# EAGLE board LedStripController Nutzen (EAGLE 6.4), part 1 of 2
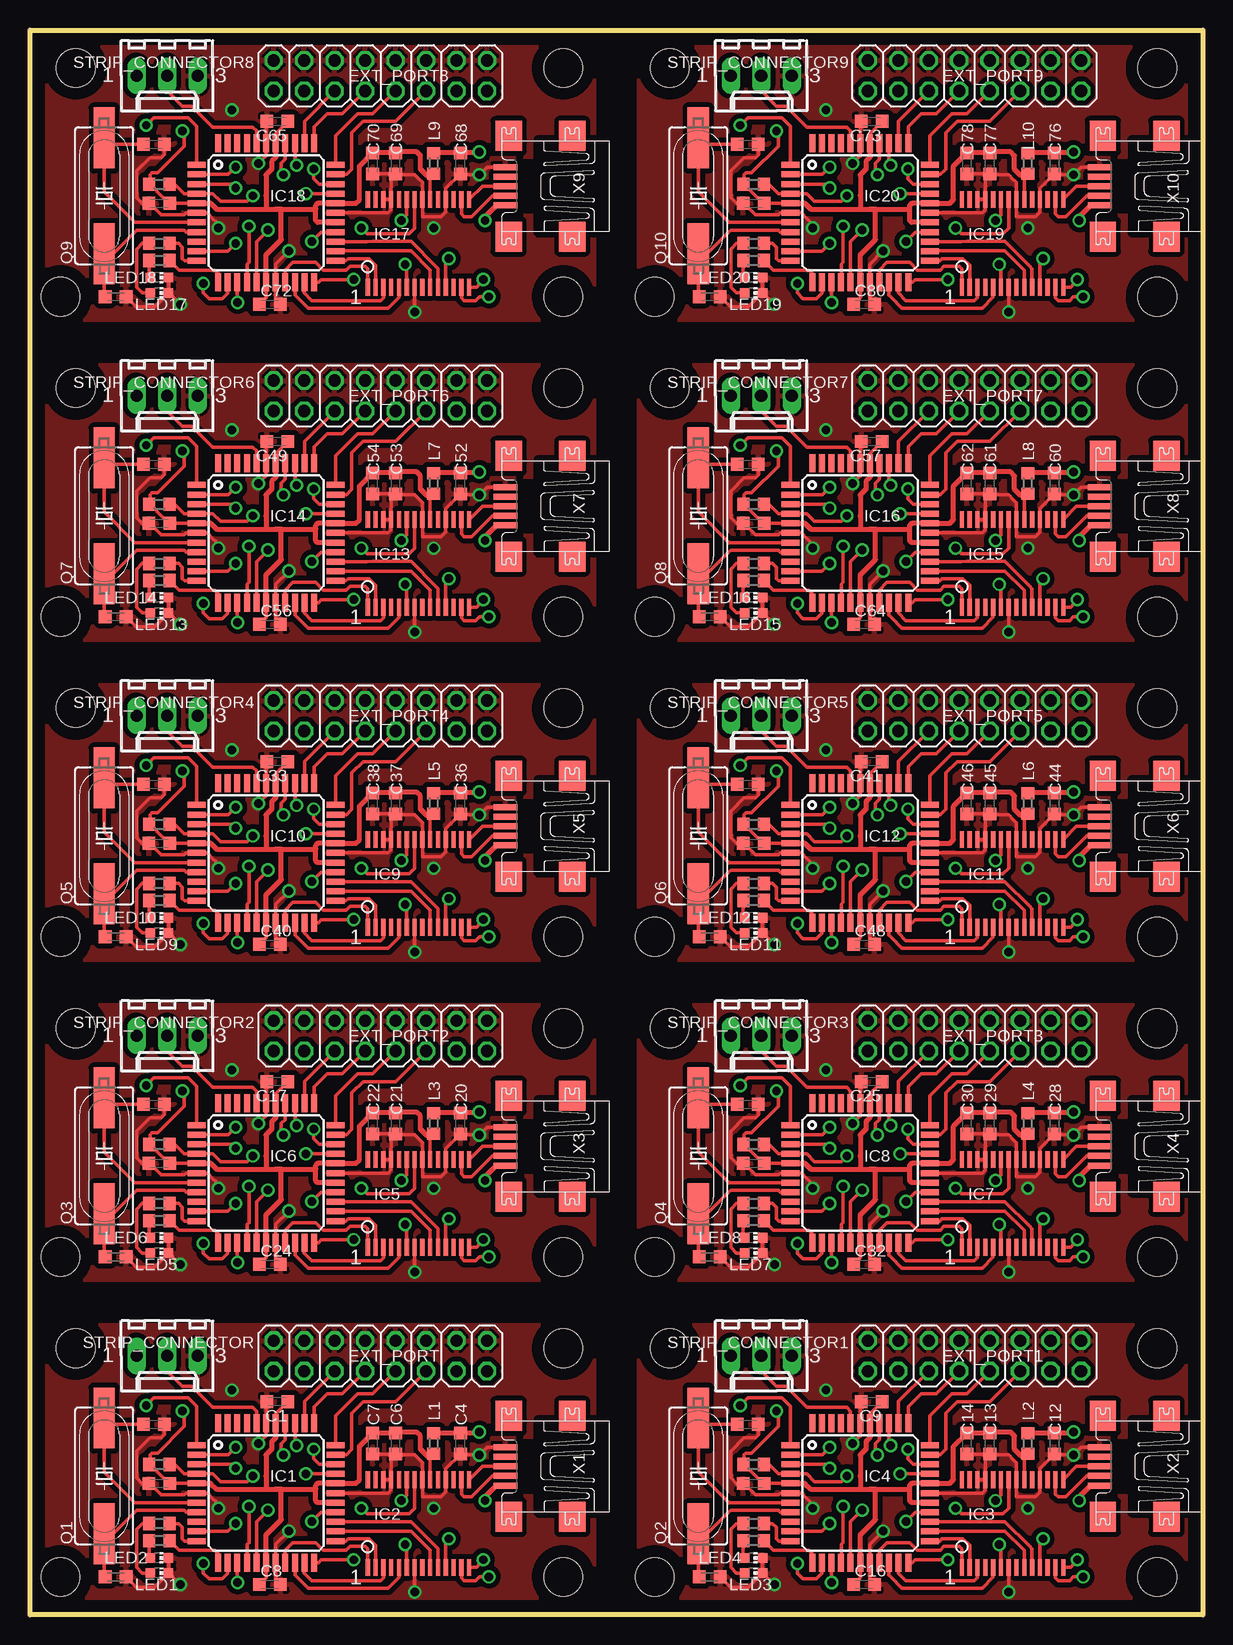
[diagram p0: board, top side]
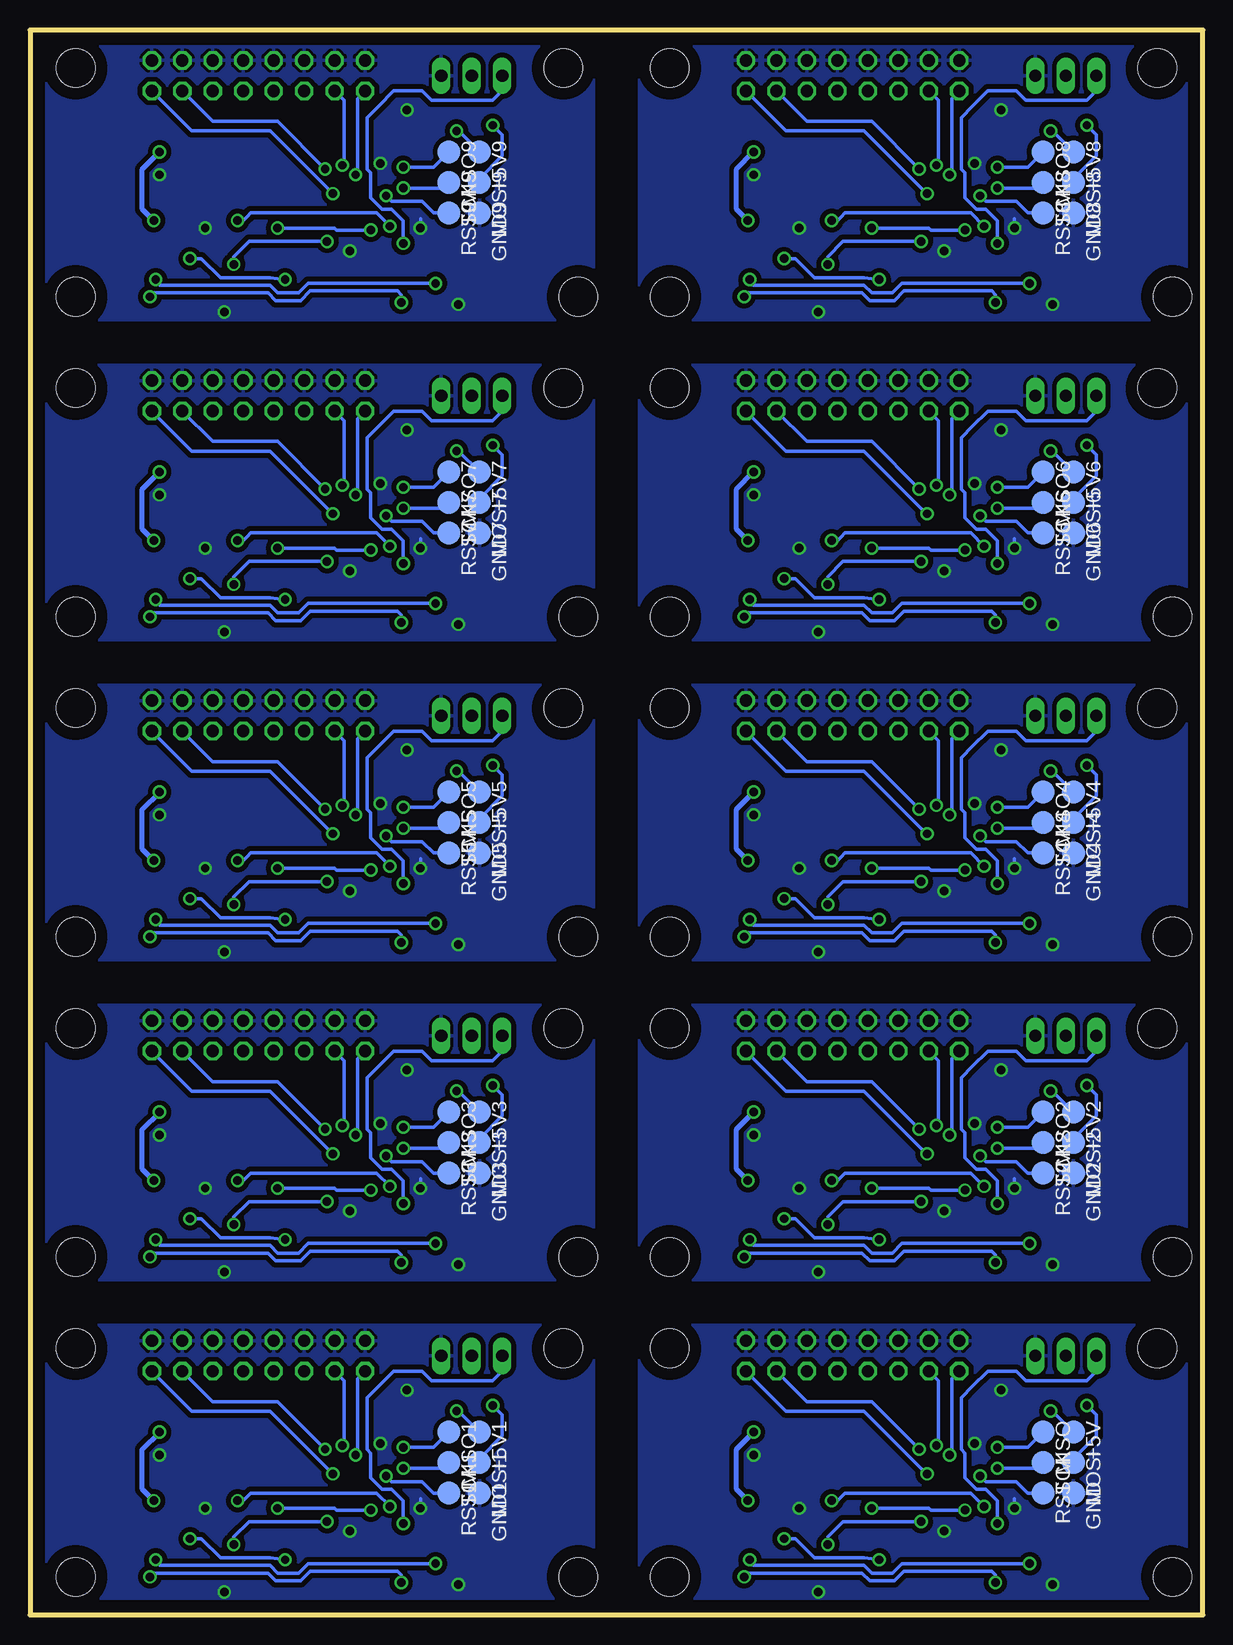
[diagram p1: board, bottom side, seen from below]

Size 97.79 x 132.08 mm. Coordinates in mm from the lower left corner, seen from the top.
Outline: 0,0 0,132.08 97.79,132.08 97.79,0 0,0
Copper layers (1*16): Top 0.035mm / dielectric 1.5mm / Bottom 0.035mm
Design rules "default": minimum track width 10mil, minimum drill 24mil, track to track 8mil, track to pad 8mil, pad to pad 8mil, via to via 8mil, smd to smd 8mil, copper to edge 40mil, drill to drill 8mil, minimum pad ring 10mil, minimum via ring 8mil, stop-mask expansion 4mil, vias tented up to drill 0mil, thermal gap 10mil
Holes 3.2 mm at 44.45,22.23 44.45,3.17 2.54,3.17 3.81,22.23 93.98,22.23 93.98,3.17 52.07,3.17 53.34,22.23 44.45,48.9 44.45,29.84 2.54,29.84 3.81,48.9 93.98,48.9 93.98,29.84 52.07,29.84 53.34,48.9 44.45,75.56 44.45,56.52 2.54,56.52 3.81,75.56 93.98,75.56 93.98,56.52 52.07,56.52 53.34,75.56 44.45,102.23 44.45,83.19 2.54,83.19 3.81,102.23 93.98,102.23 93.98,83.19 52.07,83.19 53.34,102.23 44.45,128.91 44.45,109.86 2.54,109.86 3.81,128.91 93.98,128.91 93.98,109.86 52.07,109.86 53.34,128.91

## Footprints (pad centres in the part's own frame; a part is rotated, then mirrored left to right if it is on the bottom)
TP19R = smd 1.9 x 1.9: TP 0,0
C0603K = smd 1.05 x 1.08: 1 -0.875,0; 2 0.875,0
2X08 = drill 1.016 octagon: 1 -8.89,-1.27; 2 -8.89,1.27; 3 -6.35,-1.27; 4 -6.35,1.27; 5 -3.81,-1.27; 6 -3.81,1.27; 7 -1.27,-1.27; 8 -1.27,1.27; 9 1.27,-1.27; 10 1.27,1.27; 11 3.81,-1.27; 12 3.81,1.27; 13 6.35,-1.27; 14 6.35,1.27; 15 8.89,-1.27; 16 8.89,1.27
TQFP44 = smd 1.5 x 0.5: 1 -5.8,4; 2 -5.8,3.2; 3 -5.8,2.4; 4 -5.8,1.6; 5 -5.8,0.8; 6 -5.8,0; 7 -5.8,-0.8; 8 -5.8,-1.6; 9 -5.8,-2.4; 10 -5.8,-3.2; 11 -5.8,-4; 23 5.8,-4; 24 5.8,-3.2; 25 5.8,-2.4; 26 5.8,-1.6; 27 5.8,-0.8; 28 5.8,0; 29 5.8,0.8; 30 5.8,1.6; 31 5.8,2.4; 32 5.8,3.2; 33 5.8,4 | smd 0.5 x 1.5: 12 -4,-5.8; 13 -3.2,-5.8; 14 -2.4,-5.8; 15 -1.6,-5.8; 16 -0.8,-5.8; 17 0,-5.8; 18 0.8,-5.8; 19 1.6,-5.8; 20 2.4,-5.8; 21 3.2,-5.8; 22 4,-5.8; 34 4,5.8; 35 3.2,5.8; 36 2.4,5.8; 37 1.6,5.8; 38 0.8,5.8; 39 0,5.8; 40 -0.8,5.8; 41 -1.6,5.8; 42 -2.4,5.8; 43 -3.2,5.8; 44 -4,5.8
SSOP28DB = smd 0.348 x 1.397: 1 -4.225,-3.656; 2 -3.575,-3.656; 3 -2.925,-3.656; 4 -2.275,-3.656; 5 -1.625,-3.656; 6 -0.975,-3.656; 7 -0.325,-3.656; 8 0.325,-3.656; 9 0.975,-3.656; 10 1.625,-3.656; 11 2.275,-3.656; 12 2.925,-3.656; 13 3.575,-3.656; 14 4.225,-3.656; 15 4.225,3.656; 16 3.575,3.656; 17 2.925,3.656; 18 2.275,3.656; 19 1.625,3.656; 20 0.975,3.656; 21 0.325,3.656; 22 -0.325,3.656; 23 -0.975,3.656; 24 -1.625,3.656; 25 -2.275,3.656; 26 -2.925,3.656; 27 -3.575,3.656; 28 -4.225,3.656
R0603 = smd 1 x 1.1: 1 -0.85,0; 2 0.85,0
CHIP-LED0603 = smd 0.8 x 0.8: A 0,-0.75; C 0,0.75
SM49 = smd 5.08 x 1.778: 1 -4.826,0; 2 4.826,0
6410-03 = drill 1.016 long: 1 2.54,0; 2 0,0; 3 -2.54,0
UX60A-MB-5ST = smd 2 x 0.5: 1 2.25,1.6; 2 2.25,0.8; 3 2.25,0; 4 2.25,-0.8; 5 2.25,-1.6 | smd 2.2 x 2.5: M1 -3.3,-4.2; M2 -3.3,4.2; M3 2,4.2; M4 2,-4.2

## Placement (x,y rotation side)
+5V  [TP19R]  10.79,15.24 270 bottom
+5V1  [TP19R]  60.33,15.24 270 bottom
+5V2  [TP19R]  10.79,41.91 270 bottom
+5V3  [TP19R]  60.33,41.91 270 bottom
+5V4  [TP19R]  10.79,68.58 270 bottom
+5V5  [TP19R]  60.33,68.58 270 bottom
+5V6  [TP19R]  10.79,95.25 270 bottom
+5V7  [TP19R]  60.33,95.25 270 bottom
+5V8  [TP19R]  10.79,121.92 270 bottom
+5V9  [TP19R]  60.33,121.92 270 bottom
C1  100nF  [C0603K]  20.64,17.78 180 top
C2  22pf  [C0603K]  7.14,3.17 180 top
C3  22pf  [C0603K]  10.32,15.88 180 top
C4  10n  [C0603K]  35.88,14.29 270 top
C5  100nF  [C0603K]  10.79,10.95 180 top
C6  100nF  [C0603K]  30.48,14.29 270 top
C7  10uf  [C0603K]  28.57,14.29 270 top
C8  100nF  [C0603K]  20,2.54 0 top
C9  100nF  [C0603K]  70.17,17.78 180 top
C10  22pf  [C0603K]  56.67,3.17 180 top
C11  22pf  [C0603K]  59.85,15.88 180 top
C12  10n  [C0603K]  85.41,14.29 270 top
C13  100nF  [C0603K]  80.01,14.29 270 top
C14  10uf  [C0603K]  78.11,14.29 270 top
C15  100nF  [C0603K]  60.33,10.95 180 top
C16  100nF  [C0603K]  69.53,2.54 0 top
C17  100nF  [C0603K]  20.64,44.45 180 top
C18  22pf  [C0603K]  7.14,29.84 180 top
C19  22pf  [C0603K]  10.32,42.55 180 top
C20  10n  [C0603K]  35.88,40.96 270 top
C21  100nF  [C0603K]  30.48,40.96 270 top
C22  10uf  [C0603K]  28.57,40.96 270 top
C23  100nF  [C0603K]  10.79,37.62 180 top
C24  100nF  [C0603K]  20,29.21 0 top
C25  100nF  [C0603K]  70.17,44.45 180 top
C26  22pf  [C0603K]  56.67,29.84 180 top
C27  22pf  [C0603K]  59.85,42.55 180 top
C28  10n  [C0603K]  85.41,40.96 270 top
C29  100nF  [C0603K]  80.01,40.96 270 top
C30  10uf  [C0603K]  78.11,40.96 270 top
C31  100nF  [C0603K]  60.33,37.62 180 top
C32  100nF  [C0603K]  69.53,29.21 0 top
C33  100nF  [C0603K]  20.64,71.12 180 top
C34  22pf  [C0603K]  7.14,56.52 180 top
C35  22pf  [C0603K]  10.32,69.22 180 top
C36  10n  [C0603K]  35.88,67.63 270 top
C37  100nF  [C0603K]  30.48,67.63 270 top
C38  10uf  [C0603K]  28.57,67.63 270 top
C39  100nF  [C0603K]  10.79,64.29 180 top
C40  100nF  [C0603K]  20,55.88 0 top
C41  100nF  [C0603K]  70.17,71.12 180 top
C42  22pf  [C0603K]  56.67,56.52 180 top
C43  22pf  [C0603K]  59.85,69.22 180 top
C44  10n  [C0603K]  85.41,67.63 270 top
C45  100nF  [C0603K]  80.01,67.63 270 top
C46  10uf  [C0603K]  78.11,67.63 270 top
C47  100nF  [C0603K]  60.33,64.29 180 top
C48  100nF  [C0603K]  69.53,55.88 0 top
C49  100nF  [C0603K]  20.64,97.79 180 top
C50  22pf  [C0603K]  7.14,83.19 180 top
C51  22pf  [C0603K]  10.32,95.89 180 top
C52  10n  [C0603K]  35.88,94.3 270 top
C53  100nF  [C0603K]  30.48,94.3 270 top
C54  10uf  [C0603K]  28.57,94.3 270 top
C55  100nF  [C0603K]  10.79,90.96 180 top
C56  100nF  [C0603K]  20,82.55 0 top
C57  100nF  [C0603K]  70.17,97.79 180 top
C58  22pf  [C0603K]  56.67,83.19 180 top
C59  22pf  [C0603K]  59.85,95.89 180 top
C60  10n  [C0603K]  85.41,94.3 270 top
C61  100nF  [C0603K]  80.01,94.3 270 top
C62  10uf  [C0603K]  78.11,94.3 270 top
C63  100nF  [C0603K]  60.33,90.96 180 top
C64  100nF  [C0603K]  69.53,82.55 0 top
C65  100nF  [C0603K]  20.64,124.46 180 top
C66  22pf  [C0603K]  7.14,109.86 180 top
C67  22pf  [C0603K]  10.32,122.56 180 top
C68  10n  [C0603K]  35.88,120.97 270 top
C69  100nF  [C0603K]  30.48,120.97 270 top
C70  10uf  [C0603K]  28.57,120.97 270 top
C71  100nF  [C0603K]  10.79,117.63 180 top
C72  100nF  [C0603K]  20,109.22 0 top
C73  100nF  [C0603K]  70.17,124.46 180 top
C74  22pf  [C0603K]  56.67,109.86 180 top
C75  22pf  [C0603K]  59.85,122.56 180 top
C76  10n  [C0603K]  85.41,120.97 270 top
C77  100nF  [C0603K]  80.01,120.97 270 top
C78  10uf  [C0603K]  78.11,120.97 270 top
C79  100nF  [C0603K]  60.33,117.63 180 top
C80  100nF  [C0603K]  69.53,109.22 0 top
E$1  [DOUBLE_LIZARD_SMALL]  0.64,0 0 top
E$2  [DOUBLE_LIZARD_SMALL]  0.64,0 0 top
E$3  [DOUBLE_LIZARD_SMALL]  0.64,0 0 top
E$4  [DOUBLE_LIZARD_SMALL]  0.64,0 0 top
E$5  [DOUBLE_LIZARD_SMALL]  0.64,0 0 top
EXT_PORT  [2X08]  29.21,21.59 0 top
EXT_PORT1  [2X08]  78.74,21.59 0 top
EXT_PORT2  [2X08]  29.21,48.26 0 top
EXT_PORT3  [2X08]  78.74,48.26 0 top
EXT_PORT4  [2X08]  29.21,74.93 0 top
EXT_PORT5  [2X08]  78.74,74.93 0 top
EXT_PORT6  [2X08]  29.21,101.6 0 top
EXT_PORT7  [2X08]  78.74,101.6 0 top
EXT_PORT8  [2X08]  29.21,128.27 0 top
EXT_PORT9  [2X08]  78.74,128.27 0 top
GND  [TP19R]  10.79,10.16 270 bottom
GND1  [TP19R]  60.33,10.16 270 bottom
GND2  [TP19R]  10.79,36.83 270 bottom
GND3  [TP19R]  60.33,36.83 270 bottom
GND4  [TP19R]  10.79,63.5 270 bottom
GND5  [TP19R]  60.33,63.5 270 bottom
GND6  [TP19R]  10.79,90.17 270 bottom
GND7  [TP19R]  60.33,90.17 270 bottom
GND8  [TP19R]  10.79,116.84 270 bottom
GND9  [TP19R]  60.33,116.84 270 bottom
IC1  MEGA1284  [TQFP44]  19.68,10.16 0 top
IC2  FT245RL  [SSOP28DB]  32.38,7.62 0 top
IC3  FT245RL  [SSOP28DB]  81.92,7.62 0 top
IC4  MEGA1284  [TQFP44]  69.22,10.16 0 top
IC5  FT245RL  [SSOP28DB]  32.38,34.29 0 top
IC6  MEGA1284  [TQFP44]  19.68,36.83 0 top
IC7  FT245RL  [SSOP28DB]  81.92,34.29 0 top
IC8  MEGA1284  [TQFP44]  69.22,36.83 0 top
IC9  FT245RL  [SSOP28DB]  32.38,60.96 0 top
IC10  MEGA1284  [TQFP44]  19.68,63.5 0 top
IC11  FT245RL  [SSOP28DB]  81.92,60.96 0 top
IC12  MEGA1284  [TQFP44]  69.22,63.5 0 top
IC13  FT245RL  [SSOP28DB]  32.38,87.63 0 top
IC14  MEGA1284  [TQFP44]  19.68,90.17 0 top
IC15  FT245RL  [SSOP28DB]  81.92,87.63 0 top
IC16  MEGA1284  [TQFP44]  69.22,90.17 0 top
IC17  FT245RL  [SSOP28DB]  32.38,114.3 0 top
IC18  MEGA1284  [TQFP44]  19.68,116.84 0 top
IC19  FT245RL  [SSOP28DB]  81.92,114.3 0 top
IC20  MEGA1284  [TQFP44]  69.22,116.84 0 top
L1  1.5A/307  [R0603]  33.66,14.29 270 top
L2  1.5A/307  [R0603]  83.19,14.29 270 top
L3  1.5A/307  [R0603]  33.66,40.96 270 top
L4  1.5A/307  [R0603]  83.19,40.96 270 top
L5  1.5A/307  [R0603]  33.66,67.63 270 top
L6  1.5A/307  [R0603]  83.19,67.63 270 top
L7  1.5A/307  [R0603]  33.66,94.3 270 top
L8  1.5A/307  [R0603]  83.19,94.3 270 top
L9  1.5A/307  [R0603]  33.66,120.97 270 top
L10  1.5A/307  [R0603]  83.19,120.97 270 top
LED1  [CHIP-LED0603]  10.79,3.49 270 top
LED2  [CHIP-LED0603]  10.79,4.76 270 top
LED3  [CHIP-LED0603]  60.33,3.49 270 top
LED4  [CHIP-LED0603]  60.33,4.76 270 top
LED5  [CHIP-LED0603]  10.79,30.16 270 top
LED6  [CHIP-LED0603]  10.79,31.43 270 top
LED7  [CHIP-LED0603]  60.33,30.16 270 top
LED8  [CHIP-LED0603]  60.33,31.43 270 top
LED9  [CHIP-LED0603]  10.79,56.83 270 top
LED10  [CHIP-LED0603]  10.79,58.1 270 top
LED11  [CHIP-LED0603]  60.33,56.83 270 top
LED12  [CHIP-LED0603]  60.33,58.1 270 top
LED13  [CHIP-LED0603]  10.79,83.5 270 top
LED14  [CHIP-LED0603]  10.79,84.77 270 top
LED15  [CHIP-LED0603]  60.33,83.5 270 top
LED16  [CHIP-LED0603]  60.33,84.77 270 top
LED17  [CHIP-LED0603]  10.79,110.17 270 top
LED18  [CHIP-LED0603]  10.79,111.44 270 top
LED19  [CHIP-LED0603]  60.33,110.17 270 top
LED20  [CHIP-LED0603]  60.33,111.44 270 top
MISO  [TP19R]  13.34,15.24 270 bottom
MISO1  [TP19R]  62.87,15.24 270 bottom
MISO2  [TP19R]  13.34,41.91 270 bottom
MISO3  [TP19R]  62.87,41.91 270 bottom
MISO4  [TP19R]  13.34,68.58 270 bottom
MISO5  [TP19R]  62.87,68.58 270 bottom
MISO6  [TP19R]  13.34,95.25 270 bottom
MISO7  [TP19R]  62.87,95.25 270 bottom
MISO8  [TP19R]  13.34,121.92 270 bottom
MISO9  [TP19R]  62.87,121.92 270 bottom
MOSI  [TP19R]  10.79,12.7 270 bottom
MOSI1  [TP19R]  60.33,12.7 270 bottom
MOSI2  [TP19R]  10.79,39.37 270 bottom
MOSI3  [TP19R]  60.33,39.37 270 bottom
MOSI4  [TP19R]  10.79,66.04 270 bottom
MOSI5  [TP19R]  60.33,66.04 270 bottom
MOSI6  [TP19R]  10.79,92.71 270 bottom
MOSI7  [TP19R]  60.33,92.71 270 bottom
MOSI8  [TP19R]  10.79,119.38 270 bottom
MOSI9  [TP19R]  60.33,119.38 270 bottom
Q1  20Mhz  [SM49]  6.19,11.59 90 top
Q2  20Mhz  [SM49]  55.72,11.59 90 top
Q3  20Mhz  [SM49]  6.19,38.26 90 top
Q4  20Mhz  [SM49]  55.72,38.26 90 top
Q5  20Mhz  [SM49]  6.19,64.93 90 top
Q6  20Mhz  [SM49]  55.72,64.93 90 top
Q7  20Mhz  [SM49]  6.19,91.6 90 top
Q8  20Mhz  [SM49]  55.72,91.6 90 top
Q9  20Mhz  [SM49]  6.19,118.27 90 top
Q10  20Mhz  [SM49]  55.72,118.27 90 top
R1  10k  [R0603]  10.79,12.54 0 top
R2  330  [R0603]  10.79,7.62 180 top
R3  330  [R0603]  10.79,6.19 180 top
R4  10k  [R0603]  60.33,12.54 0 top
R5  330  [R0603]  60.33,7.62 180 top
R6  330  [R0603]  60.33,6.19 180 top
R7  10k  [R0603]  10.79,39.21 0 top
R8  330  [R0603]  10.79,34.29 180 top
R9  330  [R0603]  10.79,32.86 180 top
R10  10k  [R0603]  60.33,39.21 0 top
R11  330  [R0603]  60.33,34.29 180 top
R12  330  [R0603]  60.33,32.86 180 top
R13  10k  [R0603]  10.79,65.88 0 top
R14  330  [R0603]  10.79,60.96 180 top
R15  330  [R0603]  10.79,59.53 180 top
R16  10k  [R0603]  60.33,65.88 0 top
R17  330  [R0603]  60.33,60.96 180 top
R18  330  [R0603]  60.33,59.53 180 top
R19  10k  [R0603]  10.79,92.55 0 top
R20  330  [R0603]  10.79,87.63 180 top
R21  330  [R0603]  10.79,86.2 180 top
R22  10k  [R0603]  60.33,92.55 0 top
R23  330  [R0603]  60.33,87.63 180 top
R24  330  [R0603]  60.33,86.2 180 top
R25  10k  [R0603]  10.79,119.22 0 top
R26  330  [R0603]  10.79,114.3 180 top
R27  330  [R0603]  10.79,112.87 180 top
R28  10k  [R0603]  60.33,119.22 0 top
R29  330  [R0603]  60.33,114.3 180 top
R30  330  [R0603]  60.33,112.87 180 top
RST  [TP19R]  13.34,10.16 270 bottom
RST1  [TP19R]  62.87,10.16 270 bottom
RST2  [TP19R]  13.34,36.83 270 bottom
RST3  [TP19R]  62.87,36.83 270 bottom
RST4  [TP19R]  13.34,63.5 270 bottom
RST5  [TP19R]  62.87,63.5 270 bottom
RST6  [TP19R]  13.34,90.17 270 bottom
RST7  [TP19R]  62.87,90.17 270 bottom
RST8  [TP19R]  13.34,116.84 270 bottom
RST9  [TP19R]  62.87,116.84 270 bottom
SCK  [TP19R]  13.34,12.7 270 bottom
SCK1  [TP19R]  62.87,12.7 270 bottom
SCK2  [TP19R]  13.34,39.37 270 bottom
SCK3  [TP19R]  62.87,39.37 270 bottom
SCK4  [TP19R]  13.34,66.04 270 bottom
SCK5  [TP19R]  62.87,66.04 270 bottom
SCK6  [TP19R]  13.34,92.71 270 bottom
SCK7  [TP19R]  62.87,92.71 270 bottom
SCK8  [TP19R]  13.34,119.38 270 bottom
SCK9  [TP19R]  62.87,119.38 270 bottom
STRIP_CONNECTOR  [6410-03]  11.43,21.59 180 top
STRIP_CONNECTOR1  [6410-03]  60.96,21.59 180 top
STRIP_CONNECTOR2  [6410-03]  11.43,48.26 180 top
STRIP_CONNECTOR3  [6410-03]  60.96,48.26 180 top
STRIP_CONNECTOR4  [6410-03]  11.43,74.93 180 top
STRIP_CONNECTOR5  [6410-03]  60.96,74.93 180 top
STRIP_CONNECTOR6  [6410-03]  11.43,101.6 180 top
STRIP_CONNECTOR7  [6410-03]  60.96,101.6 180 top
STRIP_CONNECTOR8  [6410-03]  11.43,128.27 180 top
STRIP_CONNECTOR9  [6410-03]  60.96,128.27 180 top
X1  MINI-USB-UX60A-MB-5ST  [UX60A-MB-5ST]  41.91,12.38 180 top
X2  MINI-USB-UX60A-MB-5ST  [UX60A-MB-5ST]  91.44,12.38 180 top
X3  MINI-USB-UX60A-MB-5ST  [UX60A-MB-5ST]  41.91,39.05 180 top
X4  MINI-USB-UX60A-MB-5ST  [UX60A-MB-5ST]  91.44,39.05 180 top
X5  MINI-USB-UX60A-MB-5ST  [UX60A-MB-5ST]  41.91,65.72 180 top
X6  MINI-USB-UX60A-MB-5ST  [UX60A-MB-5ST]  91.44,65.72 180 top
X7  MINI-USB-UX60A-MB-5ST  [UX60A-MB-5ST]  41.91,92.39 180 top
X8  MINI-USB-UX60A-MB-5ST  [UX60A-MB-5ST]  91.44,92.39 180 top
X9  MINI-USB-UX60A-MB-5ST  [UX60A-MB-5ST]  41.91,119.06 180 top
X10  MINI-USB-UX60A-MB-5ST  [UX60A-MB-5ST]  91.44,119.06 180 top

## Library data of the parts
+5V +5V1-+5V9 GND GND1-GND9 MISO MISO1-MISO9 MOSI MOSI1-MOSI9 RST RST1-RST9 SCK SCK1-SCK9 = testpad
C1-C80 = rcl
E$1-E$5 = LizardKing
EXT_PORT EXT_PORT1-EXT_PORT9 = pinhead
IC1 IC4 IC6 IC8 IC10 IC12 IC14 IC16 IC18 IC20 = 0_avr
IC2 IC3 IC5 IC7 IC9 IC11 IC13 IC15 IC17 IC19 = ftdichip-3
L1-L10 R1-R30 = 0_Standard-Parts
LED1-LED20 = led
Q1-Q10 = crystal; OC_FARNELL: unknown; OC_NEWARK: unknown
STRIP_CONNECTOR STRIP_CONNECTOR1-STRIP_CONNECTOR9 = con-molex; OC_FARNELL: unknown; OC_NEWARK: unknown
X1-X10 = con-hirose; OC_FARNELL: unknown; OC_NEWARK: unknown

## Nets
+5V: +5V.TP C1.1 C5.1 C6.1 C7.1 C8.1 IC1.5 IC1.17 IC1.27 IC1.29 IC1.38 IC2.20 L1.2 R1.1
+5V1: +5V1.TP C9.1 C13.1 C14.1 C15.1 C16.1 IC3.20 IC4.5 IC4.17 IC4.27 IC4.29 IC4.38 L2.2 R4.1
+5V2: +5V2.TP C17.1 C21.1 C22.1 C23.1 C24.1 IC5.20 IC6.5 IC6.17 IC6.27 IC6.29 IC6.38 L3.2 R7.1
+5V3: +5V3.TP C25.1 C29.1 C30.1 C31.1 C32.1 IC7.20 IC8.5 IC8.17 IC8.27 IC8.29 IC8.38 L4.2 R10.1
+5V4: +5V4.TP C33.1 C37.1 C38.1 C39.1 C40.1 IC9.20 IC10.5 IC10.17 IC10.27 IC10.29 IC10.38 L5.2 R13.1
+5V5: +5V5.TP C41.1 C45.1 C46.1 C47.1 C48.1 IC11.20 IC12.5 IC12.17 IC12.27 IC12.29 IC12.38 L6.2 R16.1
+5V6: +5V6.TP C49.1 C53.1 C54.1 C55.1 C56.1 IC13.20 IC14.5 IC14.17 IC14.27 IC14.29 IC14.38 L7.2 R19.1
+5V7: +5V7.TP C57.1 C61.1 C62.1 C63.1 C64.1 IC15.20 IC16.5 IC16.17 IC16.27 IC16.29 IC16.38 L8.2 R22.1
+5V8: +5V8.TP C65.1 C69.1 C70.1 C71.1 C72.1 IC17.20 IC18.5 IC18.17 IC18.27 IC18.29 IC18.38 L9.2 R25.1
+5V9: +5V9.TP C73.1 C77.1 C78.1 C79.1 C80.1 IC19.20 IC20.5 IC20.17 IC20.27 IC20.29 IC20.38 L10.2 R28.1
CLOCK: IC1.40 STRIP_CONNECTOR.2
CLOCK1: IC4.40 STRIP_CONNECTOR1.2
CLOCK2: IC6.40 STRIP_CONNECTOR2.2
CLOCK3: IC8.40 STRIP_CONNECTOR3.2
CLOCK4: IC10.40 STRIP_CONNECTOR4.2
CLOCK5: IC12.40 STRIP_CONNECTOR5.2
CLOCK6: IC14.40 STRIP_CONNECTOR6.2
CLOCK7: IC16.40 STRIP_CONNECTOR7.2
CLOCK8: IC18.40 STRIP_CONNECTOR8.2
CLOCK9: IC20.40 STRIP_CONNECTOR9.2
D0: IC1.19 IC2.1
D1: IC1.20 IC2.5
D2: IC1.21 IC2.3
D3: IC1.22 IC2.11
D4: IC1.23 IC2.2
D5: IC1.24 IC2.9
D6: IC1.25 IC2.10
D7: IC1.26 IC2.6
D8: IC3.1 IC4.19
D9: IC3.5 IC4.20
D10: IC3.3 IC4.21
D11: IC3.11 IC4.22
D12: IC3.2 IC4.23
D13: IC3.10 IC4.25
D14: IC3.6 IC4.26
D15: IC3.9 IC4.24
D16: IC5.1 IC6.19
D17: IC5.5 IC6.20
D18: IC5.3 IC6.21
D19: IC5.11 IC6.22
D20: IC5.2 IC6.23
D21: IC5.10 IC6.25
D22: IC5.6 IC6.26
D23: IC5.9 IC6.24
D24: IC7.1 IC8.19
D25: IC7.5 IC8.20
D26: IC7.3 IC8.21
D27: IC7.11 IC8.22
D28: IC7.2 IC8.23
D29: IC7.10 IC8.25
D30: IC7.6 IC8.26
D31: IC7.9 IC8.24
D32: IC9.1 IC10.19
D33: IC9.5 IC10.20
D34: IC9.3 IC10.21
D35: IC9.11 IC10.22
D36: IC9.2 IC10.23
D37: IC9.10 IC10.25
D38: IC9.6 IC10.26
D39: IC9.9 IC10.24
D40: IC11.1 IC12.19
D41: IC11.5 IC12.20
D42: IC11.3 IC12.21
D43: IC11.11 IC12.22
D44: IC11.2 IC12.23
D45: IC11.10 IC12.25
D46: IC11.6 IC12.26
D47: IC11.9 IC12.24
D48: IC13.1 IC14.19
D49: IC13.5 IC14.20
D50: IC13.3 IC14.21
D51: IC13.11 IC14.22
D52: IC13.2 IC14.23
D53: IC13.10 IC14.25
D54: IC13.6 IC14.26
D55: IC13.9 IC14.24
D56: IC15.1 IC16.19
D57: IC15.5 IC16.20
D58: IC15.3 IC16.21
D59: IC15.11 IC16.22
D60: IC15.2 IC16.23
D61: IC15.10 IC16.25
D62: IC15.6 IC16.26
D63: IC15.9 IC16.24
D64: IC17.1 IC18.19
D65: IC17.5 IC18.20
D66: IC17.3 IC18.21
D67: IC17.11 IC18.22
D68: IC17.2 IC18.23
D69: IC17.10 IC18.25
D70: IC17.6 IC18.26
D71: IC17.9 IC18.24
D72: IC19.1 IC20.19
D73: IC19.5 IC20.20
D74: IC19.3 IC20.21
D75: IC19.11 IC20.22
D76: IC19.2 IC20.23
D77: IC19.10 IC20.25
D78: IC19.6 IC20.26
D79: IC19.9 IC20.24
D+: IC2.15 X1.3
D+1: IC3.15 X2.3
D+2: IC5.15 X3.3
D+3: IC7.15 X4.3
D+4: IC9.15 X5.3
D+5: IC11.15 X6.3
D+6: IC13.15 X7.3
D+7: IC15.15 X8.3
D+8: IC17.15 X9.3
D+9: IC19.15 X10.3
D-: IC2.16 X1.2
D-1: IC3.16 X2.2
D-2: IC5.16 X3.2
D-3: IC7.16 X4.2
D-4: IC9.16 X5.2
D-5: IC11.16 X6.2
D-6: IC13.16 X7.2
D-7: IC15.16 X8.2
D-8: IC17.16 X9.2
D-9: IC19.16 X10.2
DATA: IC1.10 STRIP_CONNECTOR.1
DATA1: IC4.10 STRIP_CONNECTOR1.1
DATA2: IC6.10 STRIP_CONNECTOR2.1
DATA3: IC8.10 STRIP_CONNECTOR3.1
DATA4: IC10.10 STRIP_CONNECTOR4.1
DATA5: IC12.10 STRIP_CONNECTOR5.1
DATA6: IC14.10 STRIP_CONNECTOR6.1
DATA7: IC16.10 STRIP_CONNECTOR7.1
DATA8: IC18.10 STRIP_CONNECTOR8.1
DATA9: IC20.10 STRIP_CONNECTOR9.1
GND: C1.2 C2.1 C3.1 C4.2 C5.2 C6.2 C7.2 C8.2 EXT_PORT.2 EXT_PORT.4 EXT_PORT.6 EXT_PORT.8 EXT_PORT.10 EXT_PORT.12 EXT_PORT.14 EXT_PORT.16 GND.TP IC1.6 IC1.18 IC1.28 IC1.39 IC2.7 IC2.18 IC2.21 IC2.25 IC2.26 LED1.C LED2.C STRIP_CONNECTOR.3 X1.5
GND1: C9.2 C10.1 C11.1 C12.2 C13.2 C14.2 C15.2 C16.2 EXT_PORT1.2 EXT_PORT1.4 EXT_PORT1.6 EXT_PORT1.8 EXT_PORT1.10 EXT_PORT1.12 EXT_PORT1.14 EXT_PORT1.16 GND1.TP IC3.7 IC3.18 IC3.21 IC3.25 IC3.26 IC4.6 IC4.18 IC4.28 IC4.39 LED3.C LED4.C STRIP_CONNECTOR1.3 X2.5
GND2: C17.2 C18.1 C19.1 C20.2 C21.2 C22.2 C23.2 C24.2 EXT_PORT2.2 EXT_PORT2.4 EXT_PORT2.6 EXT_PORT2.8 EXT_PORT2.10 EXT_PORT2.12 EXT_PORT2.14 EXT_PORT2.16 GND2.TP IC5.7 IC5.18 IC5.21 IC5.25 IC5.26 IC6.6 IC6.18 IC6.28 IC6.39 LED5.C LED6.C STRIP_CONNECTOR2.3 X3.5
GND3: C25.2 C26.1 C27.1 C28.2 C29.2 C30.2 C31.2 C32.2 EXT_PORT3.2 EXT_PORT3.4 EXT_PORT3.6 EXT_PORT3.8 EXT_PORT3.10 EXT_PORT3.12 EXT_PORT3.14 EXT_PORT3.16 GND3.TP IC7.7 IC7.18 IC7.21 IC7.25 IC7.26 IC8.6 IC8.18 IC8.28 IC8.39 LED7.C LED8.C STRIP_CONNECTOR3.3 X4.5
GND4: C33.2 C34.1 C35.1 C36.2 C37.2 C38.2 C39.2 C40.2 EXT_PORT4.2 EXT_PORT4.4 EXT_PORT4.6 EXT_PORT4.8 EXT_PORT4.10 EXT_PORT4.12 EXT_PORT4.14 EXT_PORT4.16 GND4.TP IC9.7 IC9.18 IC9.21 IC9.25 IC9.26 IC10.6 IC10.18 IC10.28 IC10.39 LED9.C LED10.C STRIP_CONNECTOR4.3 X5.5
GND5: C41.2 C42.1 C43.1 C44.2 C45.2 C46.2 C47.2 C48.2 EXT_PORT5.2 EXT_PORT5.4 EXT_PORT5.6 EXT_PORT5.8 EXT_PORT5.10 EXT_PORT5.12 EXT_PORT5.14 EXT_PORT5.16 GND5.TP IC11.7 IC11.18 IC11.21 IC11.25 IC11.26 IC12.6 IC12.18 IC12.28 IC12.39 LED11.C LED12.C STRIP_CONNECTOR5.3 X6.5
GND6: C49.2 C50.1 C51.1 C52.2 C53.2 C54.2 C55.2 C56.2 EXT_PORT6.2 EXT_PORT6.4 EXT_PORT6.6 EXT_PORT6.8 EXT_PORT6.10 EXT_PORT6.12 EXT_PORT6.14 EXT_PORT6.16 GND6.TP IC13.7 IC13.18 IC13.21 IC13.25 IC13.26 IC14.6 IC14.18 IC14.28 IC14.39 LED13.C LED14.C STRIP_CONNECTOR6.3 X7.5
GND7: C57.2 C58.1 C59.1 C60.2 C61.2 C62.2 C63.2 C64.2 EXT_PORT7.2 EXT_PORT7.4 EXT_PORT7.6 EXT_PORT7.8 EXT_PORT7.10 EXT_PORT7.12 EXT_PORT7.14 EXT_PORT7.16 GND7.TP IC15.7 IC15.18 IC15.21 IC15.25 IC15.26 IC16.6 IC16.18 IC16.28 IC16.39 LED15.C LED16.C STRIP_CONNECTOR7.3 X8.5
GND8: C65.2 C66.1 C67.1 C68.2 C69.2 C70.2 C71.2 C72.2 EXT_PORT8.2 EXT_PORT8.4 EXT_PORT8.6 EXT_PORT8.8 EXT_PORT8.10 EXT_PORT8.12 EXT_PORT8.14 EXT_PORT8.16 GND8.TP IC17.7 IC17.18 IC17.21 IC17.25 IC17.26 IC18.6 IC18.18 IC18.28 IC18.39 LED17.C LED18.C STRIP_CONNECTOR8.3 X9.5
GND9: C73.2 C74.1 C75.1 C76.2 C77.2 C78.2 C79.2 C80.2 EXT_PORT9.2 EXT_PORT9.4 EXT_PORT9.6 EXT_PORT9.8 EXT_PORT9.10 EXT_PORT9.12 EXT_PORT9.14 EXT_PORT9.16 GND9.TP IC19.7 IC19.18 IC19.21 IC19.25 IC19.26 IC20.6 IC20.18 IC20.28 IC20.39 LED19.C LED20.C STRIP_CONNECTOR9.3 X10.5
MISO: IC1.2 MISO.TP
MISO1: IC4.2 MISO1.TP
MISO2: IC6.2 MISO2.TP
MISO3: IC8.2 MISO3.TP
MISO4: IC10.2 MISO4.TP
MISO5: IC12.2 MISO5.TP
MISO6: IC14.2 MISO6.TP
MISO7: IC16.2 MISO7.TP
MISO8: IC18.2 MISO8.TP
MISO9: IC20.2 MISO9.TP
MOSI: IC1.1 MOSI.TP
MOSI1: IC4.1 MOSI1.TP
MOSI2: IC6.1 MOSI2.TP
MOSI3: IC8.1 MOSI3.TP
MOSI4: IC10.1 MOSI4.TP
MOSI5: IC12.1 MOSI5.TP
MOSI6: IC14.1 MOSI6.TP
MOSI7: IC16.1 MOSI7.TP
MOSI8: IC18.1 MOSI8.TP
MOSI9: IC20.1 MOSI9.TP
N$1: EXT_PORT.15 IC1.30
N$2: EXT_PORT.13 IC1.31
N$3: IC1.11 R2.1
N$4: EXT_PORT.11 IC1.32
N$5: EXT_PORT.9 IC1.33
N$6: IC1.12 R3.1
N$7: EXT_PORT.7 IC1.34
N$8: C2.2 IC1.8 Q1.1
N$9: C3.2 IC1.7 Q1.2
N$10: EXT_PORT.5 IC1.35
N$11: EXT_PORT.3 IC1.36
N$12: C10.2 IC4.8 Q2.1
N$13: EXT_PORT.1 IC1.37
N$14: C11.2 IC4.7 Q2.2
N$15: LED3.A R5.2
N$16: LED4.A R6.2
N$17: EXT_PORT1.15 IC4.30
N$18: EXT_PORT1.13 IC4.31
N$19: EXT_PORT1.11 IC4.32
N$20: EXT_PORT1.9 IC4.33
N$21: LED1.A R2.2
N$22: LED2.A R3.2
N$23: EXT_PORT1.7 IC4.34
N$24: EXT_PORT1.5 IC4.35
N$25: EXT_PORT1.3 IC4.36
N$26: EXT_PORT1.1 IC4.37
N$27: IC4.11 R5.1
N$28: IC4.12 R6.1
N$29: C18.2 IC6.8 Q3.1
N$30: C19.2 IC6.7 Q3.2
N$31: LED5.A R8.2
N$32: LED6.A R9.2
N$33: EXT_PORT2.15 IC6.30
N$34: EXT_PORT2.13 IC6.31
N$35: EXT_PORT2.11 IC6.32
N$36: EXT_PORT2.9 IC6.33
N$37: EXT_PORT2.7 IC6.34
N$38: EXT_PORT2.5 IC6.35
N$39: EXT_PORT2.3 IC6.36
N$40: EXT_PORT2.1 IC6.37
N$41: IC6.11 R8.1
N$42: IC6.12 R9.1
N$43: C26.2 IC8.8 Q4.1
N$44: C27.2 IC8.7 Q4.2
N$45: LED7.A R11.2
N$46: LED8.A R12.2
N$47: EXT_PORT3.15 IC8.30
N$48: EXT_PORT3.13 IC8.31
N$49: EXT_PORT3.11 IC8.32
N$50: EXT_PORT3.9 IC8.33
N$51: EXT_PORT3.7 IC8.34
N$52: EXT_PORT3.5 IC8.35
N$53: EXT_PORT3.3 IC8.36
N$54: EXT_PORT3.1 IC8.37
N$55: IC8.11 R11.1
N$56: IC8.12 R12.1
N$57: C34.2 IC10.8 Q5.1
N$58: C35.2 IC10.7 Q5.2
N$59: LED9.A R14.2
N$60: LED10.A R15.2
N$61: EXT_PORT4.15 IC10.30
N$62: EXT_PORT4.13 IC10.31
N$63: EXT_PORT4.11 IC10.32
N$64: EXT_PORT4.9 IC10.33
N$65: EXT_PORT4.7 IC10.34
N$66: EXT_PORT4.5 IC10.35
N$67: EXT_PORT4.3 IC10.36
N$68: EXT_PORT4.1 IC10.37
N$69: IC10.11 R14.1
N$70: IC10.12 R15.1
N$71: C42.2 IC12.8 Q6.1
N$72: C43.2 IC12.7 Q6.2
N$73: LED11.A R17.2
N$74: LED12.A R18.2
N$75: EXT_PORT5.15 IC12.30
N$76: EXT_PORT5.13 IC12.31
N$77: EXT_PORT5.11 IC12.32
N$78: EXT_PORT5.9 IC12.33
N$79: EXT_PORT5.7 IC12.34
N$80: EXT_PORT5.5 IC12.35
N$81: EXT_PORT5.3 IC12.36
N$82: EXT_PORT5.1 IC12.37
N$83: IC12.11 R17.1
N$84: IC12.12 R18.1
N$85: C50.2 IC14.8 Q7.1
N$86: C51.2 IC14.7 Q7.2
N$87: LED13.A R20.2
N$88: LED14.A R21.2
N$89: EXT_PORT6.15 IC14.30
N$90: EXT_PORT6.13 IC14.31
N$91: EXT_PORT6.11 IC14.32
N$92: EXT_PORT6.9 IC14.33
N$93: EXT_PORT6.7 IC14.34
N$94: EXT_PORT6.5 IC14.35
N$95: EXT_PORT6.3 IC14.36
N$96: EXT_PORT6.1 IC14.37
N$97: IC14.11 R20.1
N$98: IC14.12 R21.1
N$99: C58.2 IC16.8 Q8.1
N$100: C59.2 IC16.7 Q8.2
N$101: LED15.A R23.2
N$102: LED16.A R24.2
N$103: EXT_PORT7.15 IC16.30
N$104: EXT_PORT7.13 IC16.31
N$105: EXT_PORT7.11 IC16.32
N$106: EXT_PORT7.9 IC16.33
N$107: EXT_PORT7.7 IC16.34
N$108: EXT_PORT7.5 IC16.35
N$109: EXT_PORT7.3 IC16.36
N$110: EXT_PORT7.1 IC16.37
N$111: IC16.11 R23.1
N$112: IC16.12 R24.1
N$113: C66.2 IC18.8 Q9.1
N$114: C67.2 IC18.7 Q9.2
N$115: LED17.A R26.2
N$116: LED18.A R27.2
N$117: EXT_PORT8.15 IC18.30
N$118: EXT_PORT8.13 IC18.31
N$119: EXT_PORT8.11 IC18.32
N$120: EXT_PORT8.9 IC18.33
N$121: EXT_PORT8.7 IC18.34
N$122: EXT_PORT8.5 IC18.35
N$123: EXT_PORT8.3 IC18.36
N$124: EXT_PORT8.1 IC18.37
N$125: IC18.11 R26.1
N$126: IC18.12 R27.1
N$127: C74.2 IC20.8 Q10.1
N$128: C75.2 IC20.7 Q10.2
N$129: LED19.A R29.2
N$130: LED20.A R30.2
N$131: EXT_PORT9.15 IC20.30
N$132: EXT_PORT9.13 IC20.31
N$133: EXT_PORT9.11 IC20.32
N$134: EXT_PORT9.9 IC20.33
N$135: EXT_PORT9.7 IC20.34
N$136: EXT_PORT9.5 IC20.35
N$137: EXT_PORT9.3 IC20.36
N$138: EXT_PORT9.1 IC20.37
N$139: IC20.11 R29.1
N$140: IC20.12 R30.1
PWEN: IC2.12
PWEN1: IC3.12
PWEN2: IC5.12
PWEN3: IC7.12
PWEN4: IC9.12
PWEN5: IC11.12
PWEN6: IC13.12
PWEN7: IC15.12
PWEN8: IC17.12
PWEN9: IC19.12
RD: IC1.14 IC2.13
RD1: IC3.13 IC4.14
RD2: IC5.13 IC6.14
RD3: IC7.13 IC8.14
RD4: IC9.13 IC10.14
RD5: IC11.13 IC12.14
RD6: IC13.13 IC14.14
RD7: IC15.13 IC16.14
RD8: IC17.13 IC18.14
RD9: IC19.13 IC20.14
RST: IC1.4 R1.2 RST.TP
RST1: IC4.4 R4.2 RST1.TP
RST2: IC6.4 R7.2 RST2.TP
RST3: IC8.4 R10.2 RST3.TP
RST4: IC10.4 R13.2 RST4.TP
RST5: IC12.4 R16.2 RST5.TP
RST6: IC14.4 R19.2 RST6.TP
RST7: IC16.4 R22.2 RST7.TP
RST8: IC18.4 R25.2 RST8.TP
RST9: IC20.4 R28.2 RST9.TP
RXF: IC1.15 IC2.23
RXF1: IC3.23 IC4.15
RXF2: IC5.23 IC6.15
RXF3: IC7.23 IC8.15
RXF4: IC9.23 IC10.15
RXF5: IC11.23 IC12.15
RXF6: IC13.23 IC14.15
RXF7: IC15.23 IC16.15
RXF8: IC17.23 IC18.15
RXF9: IC19.23 IC20.15
SCK: IC1.3 SCK.TP
SCK1: IC4.3 SCK1.TP
SCK2: IC6.3 SCK2.TP
SCK3: IC8.3 SCK3.TP
SCK4: IC10.3 SCK4.TP
SCK5: IC12.3 SCK5.TP
SCK6: IC14.3 SCK6.TP
SCK7: IC16.3 SCK7.TP
SCK8: IC18.3 SCK8.TP
SCK9: IC20.3 SCK9.TP
TXE: IC1.16 IC2.22
TXE1: IC3.22 IC4.16
TXE2: IC5.22 IC6.16
TXE3: IC7.22 IC8.16
TXE4: IC9.22 IC10.16
TXE5: IC11.22 IC12.16
TXE6: IC13.22 IC14.16
TXE7: IC15.22 IC16.16
TXE8: IC17.22 IC18.16
TXE9: IC19.22 IC20.16
USBSUPPLY: C4.1 L1.1 X1.1
USBSUPPLY1: C12.1 L2.1 X2.1
USBSUPPLY2: C20.1 L3.1 X3.1
USBSUPPLY3: C28.1 L4.1 X4.1
USBSUPPLY4: C36.1 L5.1 X5.1
USBSUPPLY5: C44.1 L6.1 X6.1
USBSUPPLY6: C52.1 L7.1 X7.1
USBSUPPLY7: C60.1 L8.1 X8.1
USBSUPPLY8: C68.1 L9.1 X9.1
USBSUPPLY9: C76.1 L10.1 X10.1
VCCIO: IC2.4
VCCIO1: IC3.4
VCCIO2: IC5.4
VCCIO3: IC7.4
VCCIO4: IC9.4
VCCIO5: IC11.4
VCCIO6: IC13.4
VCCIO7: IC15.4
VCCIO8: IC17.4
VCCIO9: IC19.4
WR: IC1.13 IC2.14
WR1: IC3.14 IC4.13
WR2: IC5.14 IC6.13
WR3: IC7.14 IC8.13
WR4: IC9.14 IC10.13
WR5: IC11.14 IC12.13
WR6: IC13.14 IC14.13
WR7: IC15.14 IC16.13
WR8: IC17.14 IC18.13
WR9: IC19.14 IC20.13

## Tracks (layer width: path | path; a pad name or v marks a point on that pad's centre or on a via)
+5V  (via drill 0.7)
  Top 0.305: IC2.20 33.36,13.27 | 33.36,13.27 L1.2 | 33.36,13.27 33.09,13.27 | 30.56,15.24 C6.1 | IC1.17 19.68,3.1 C8.1 | 21.59,17.78 C1.1 20.48,16.75 IC1.38 | IC1.5 C5.1 11.59,10.95 11.11,11.43 10,12.54 R1.1 10,12.6 10,13.18 10,13.34 10.16,13.49 10.64,13.49 12.86,15.72 12.86,16.83 v12.7,16.99
  Top 0.406: IC1.27 23.98,9.36 23.81,9.53 23.81,10.48 | 23.81,10.48 23.81,10.79 23.98,10.96 IC1.29 27.15,10.96 27.46,11.27 27.46,14.05 C7.1 C6.1 | 20.95,10.48 20.48,10.48 | 20.48,10.48 20.95,10.48 | 20.95,10.48 23.81,10.48 | IC1.17 19.68,6.67 20.95,7.94 20.95,10.48 | 33.09,13.27 32.54,13.81 32.54,14.92 32.23,15.24 30.56,15.24 | IC1.5 15.09,10.96 14.92,10.95 15.08,10.95 15.56,10.48 19.68,10.48 | IC1.38 20.48,14.92 20.48,14.77 20.16,14.45 20.16,13.81 19.68,13.34 19.68,11.59 19.68,10.48 | 19.68,10.48 20.48,10.48
  Bottom 0.305: 10.79,15.72 +5V.TP 12.54,16.99 v12.7,16.99
+5V1  (via drill 0.7)
  Top 0.305: IC3.20 82.89,13.27 | 82.89,13.27 L2.2 | 82.89,13.27 82.62,13.27 | 80.09,15.24 C13.1 | IC4.17 69.22,3.1 C16.1 | 71.12,17.78 C9.1 70.02,16.75 IC4.38 | IC4.5 C15.1 61.12,10.95 60.64,11.43 59.53,12.54 R4.1 59.53,12.6 59.53,13.18 59.53,13.34 59.69,13.49 60.17,13.49 62.39,15.72 62.39,16.83 v62.23,16.99
  Top 0.406: IC4.27 73.51,9.36 73.34,9.53 73.34,10.48 | 73.34,10.48 73.34,10.79 73.51,10.96 IC4.29 76.68,10.96 76.99,11.27 76.99,14.05 C14.1 C13.1 | 70.48,10.48 70.01,10.48 | 70.01,10.48 70.48,10.48 | 70.48,10.48 73.34,10.48 | IC4.17 69.22,6.67 70.48,7.94 70.48,10.48 | 82.62,13.27 82.07,13.81 82.07,14.92 81.76,15.24 80.09,15.24 | IC4.5 64.62,10.96 64.45,10.95 64.61,10.95 65.09,10.48 69.22,10.48 | IC4.38 70.02,14.92 70.02,14.77 69.69,14.45 69.69,13.81 69.22,13.34 69.22,11.59 69.22,10.48 | 69.22,10.48 70.01,10.48
  Bottom 0.305: 60.33,15.72 +5V1.TP 62.07,16.99 v62.23,16.99
+5V2  (via drill 0.7)
  Top 0.305: IC5.20 33.36,39.94 | 33.36,39.94 L3.2 | 33.36,39.94 33.09,39.94 | 30.56,41.91 C21.1 | IC6.17 19.68,29.77 C24.1 | 21.59,44.45 C17.1 20.48,43.42 IC6.38 | IC6.5 C23.1 11.59,37.62 11.11,38.1 10,39.21 R7.1 10,39.27 10,39.85 10,40.01 10.16,40.16 10.64,40.16 12.86,42.39 12.86,43.5 v12.7,43.66
  Top 0.406: IC6.27 23.98,36.03 23.81,36.2 23.81,37.15 | 23.81,37.15 23.81,37.47 23.98,37.63 IC6.29 27.15,37.63 27.46,37.94 27.46,40.72 C22.1 C21.1 | 20.95,37.15 20.48,37.15 | 20.48,37.15 20.95,37.15 | 20.95,37.15 23.81,37.15 | IC6.17 19.68,33.34 20.95,34.61 20.95,37.15 | 33.09,39.94 32.54,40.48 32.54,41.59 32.23,41.91 30.56,41.91 | IC6.5 15.09,37.63 14.92,37.62 15.08,37.62 15.56,37.15 19.68,37.15 | IC6.38 20.48,41.59 20.48,41.44 20.16,41.12 20.16,40.48 19.68,40.01 19.68,38.26 19.68,37.15 | 19.68,37.15 20.48,37.15
  Bottom 0.305: 10.79,42.39 +5V2.TP 12.54,43.66 v12.7,43.66
+5V3  (via drill 0.7)
  Top 0.305: IC7.20 82.89,39.94 | 82.89,39.94 L4.2 | 82.89,39.94 82.62,39.94 | 80.09,41.91 C29.1 | IC8.17 69.22,29.77 C32.1 | 71.12,44.45 C25.1 70.02,43.42 IC8.38 | IC8.5 C31.1 61.12,37.62 60.64,38.1 59.53,39.21 R10.1 59.53,39.27 59.53,39.85 59.53,40.01 59.69,40.16 60.17,40.16 62.39,42.39 62.39,43.5 v62.23,43.66
  Top 0.406: IC8.27 73.51,36.03 73.34,36.2 73.34,37.15 | 73.34,37.15 73.34,37.47 73.51,37.63 IC8.29 76.68,37.63 76.99,37.94 76.99,40.72 C30.1 C29.1 | 70.48,37.15 70.01,37.15 | 70.01,37.15 70.48,37.15 | 70.48,37.15 73.34,37.15 | IC8.17 69.22,33.34 70.48,34.61 70.48,37.15 | 82.62,39.94 82.07,40.48 82.07,41.59 81.76,41.91 80.09,41.91 | IC8.5 64.62,37.63 64.45,37.62 64.61,37.62 65.09,37.15 69.22,37.15 | IC8.38 70.02,41.59 70.02,41.44 69.69,41.12 69.69,40.48 69.22,40.01 69.22,38.26 69.22,37.15 | 69.22,37.15 70.01,37.15
  Bottom 0.305: 60.33,42.39 +5V3.TP 62.07,43.66 v62.23,43.66
+5V4  (via drill 0.7)
  Top 0.305: IC9.20 33.36,66.61 | 33.36,66.61 L5.2 | 33.36,66.61 33.09,66.61 | 30.56,68.58 C37.1 | IC10.17 19.68,56.44 C40.1 | 21.59,71.12 C33.1 20.48,70.09 IC10.38 | IC10.5 C39.1 11.59,64.29 11.11,64.77 10,65.88 R13.1 10,65.94 10,66.52 10,66.67 10.16,66.83 10.64,66.83 12.86,69.06 12.86,70.17 v12.7,70.33
  Top 0.406: IC10.27 23.98,62.7 23.81,62.87 23.81,63.82 | 23.81,63.82 23.81,64.14 23.98,64.3 IC10.29 27.15,64.3 27.46,64.61 27.46,67.39 C38.1 C37.1 | 20.95,63.82 20.48,63.82 | 20.48,63.82 20.95,63.82 | 20.95,63.82 23.81,63.82 | IC10.17 19.68,60.01 20.95,61.28 20.95,63.82 | 33.09,66.61 32.54,67.15 32.54,68.26 32.23,68.58 30.56,68.58 | IC10.5 15.09,64.3 14.92,64.29 15.08,64.29 15.56,63.82 19.68,63.82 | IC10.38 20.48,68.26 20.48,68.11 20.16,67.79 20.16,67.15 19.68,66.67 19.68,64.93 19.68,63.82 | 19.68,63.82 20.48,63.82
  Bottom 0.305: 10.79,69.06 +5V4.TP 12.54,70.33 v12.7,70.33
+5V5  (via drill 0.7)
  Top 0.305: IC11.20 82.89,66.61 | 82.89,66.61 L6.2 | 82.89,66.61 82.62,66.61 | 80.09,68.58 C45.1 | IC12.17 69.22,56.44 C48.1 | 71.12,71.12 C41.1 70.02,70.09 IC12.38 | IC12.5 C47.1 61.12,64.29 60.64,64.77 59.53,65.88 R16.1 59.53,65.94 59.53,66.52 59.53,66.67 59.69,66.83 60.17,66.83 62.39,69.06 62.39,70.17 v62.23,70.33
  Top 0.406: IC12.27 73.51,62.7 73.34,62.87 73.34,63.82 | 73.34,63.82 73.34,64.14 73.51,64.3 IC12.29 76.68,64.3 76.99,64.61 76.99,67.39 C46.1 C45.1 | 70.48,63.82 70.01,63.82 | 70.01,63.82 70.48,63.82 | 70.48,63.82 73.34,63.82 | IC12.17 69.22,60.01 70.48,61.28 70.48,63.82 | 82.62,66.61 82.07,67.15 82.07,68.26 81.76,68.58 80.09,68.58 | IC12.5 64.62,64.3 64.45,64.29 64.61,64.29 65.09,63.82 69.22,63.82 | IC12.38 70.02,68.26 70.02,68.11 69.69,67.79 69.69,67.15 69.22,66.67 69.22,64.93 69.22,63.82 | 69.22,63.82 70.01,63.82
  Bottom 0.305: 60.33,69.06 +5V5.TP 62.07,70.33 v62.23,70.33
+5V6  (via drill 0.7)
  Top 0.305: IC13.20 33.36,93.28 | 33.36,93.28 L7.2 | 33.36,93.28 33.09,93.28 | 30.56,95.25 C53.1 | IC14.17 19.68,83.11 C56.1 | 21.59,97.79 C49.1 20.48,96.76 IC14.38 | IC14.5 C55.1 11.59,90.96 11.11,91.44 10,92.55 R19.1 10,92.61 10,93.19 10,93.34 10.16,93.5 10.64,93.5 12.86,95.73 12.86,96.84 v12.7,97
  Top 0.406: IC14.27 23.98,89.37 23.81,89.53 23.81,90.49 | 23.81,90.49 23.81,90.81 23.98,90.97 IC14.29 27.15,90.97 27.46,91.28 27.46,94.06 C54.1 C53.1 | 20.95,90.49 20.48,90.49 | 20.48,90.49 20.95,90.49 | 20.95,90.49 23.81,90.49 | IC14.17 19.68,86.68 20.95,87.95 20.95,90.49 | 33.09,93.28 32.54,93.82 32.54,94.93 32.23,95.25 30.56,95.25 | IC14.5 15.09,90.97 14.92,90.96 15.08,90.96 15.56,90.49 19.68,90.49 | IC14.38 20.48,94.93 20.48,94.78 20.16,94.46 20.16,93.82 19.68,93.34 19.68,91.6 19.68,90.49 | 19.68,90.49 20.48,90.49
  Bottom 0.305: 10.79,95.73 +5V6.TP 12.54,97 v12.7,97
+5V7  (via drill 0.7)
  Top 0.305: IC15.20 82.89,93.28 | 82.89,93.28 L8.2 | 82.89,93.28 82.62,93.28 | 80.09,95.25 C61.1 | IC16.17 69.22,83.11 C64.1 | 71.12,97.79 C57.1 70.02,96.76 IC16.38 | IC16.5 C63.1 61.12,90.96 60.64,91.44 59.53,92.55 R22.1 59.53,92.61 59.53,93.19 59.53,93.34 59.69,93.5 60.17,93.5 62.39,95.73 62.39,96.84 v62.23,97
  Top 0.406: IC16.27 73.51,89.37 73.34,89.53 73.34,90.49 | 73.34,90.49 73.34,90.81 73.51,90.97 IC16.29 76.68,90.97 76.99,91.28 76.99,94.06 C62.1 C61.1 | 70.48,90.49 70.01,90.49 | 70.01,90.49 70.48,90.49 | 70.48,90.49 73.34,90.49 | IC16.17 69.22,86.68 70.48,87.95 70.48,90.49 | 82.62,93.28 82.07,93.82 82.07,94.93 81.76,95.25 80.09,95.25 | IC16.5 64.62,90.97 64.45,90.96 64.61,90.96 65.09,90.49 69.22,90.49 | IC16.38 70.02,94.93 70.02,94.78 69.69,94.46 69.69,93.82 69.22,93.34 69.22,91.6 69.22,90.49 | 69.22,90.49 70.01,90.49
  Bottom 0.305: 60.33,95.73 +5V7.TP 62.07,97 v62.23,97
+5V8  (via drill 0.7)
  Top 0.305: IC17.20 33.36,119.94 | 33.36,119.94 L9.2 | 33.36,119.94 33.09,119.94 | 30.56,121.92 C69.1 | IC18.17 19.68,109.78 C72.1 | 21.59,124.46 C65.1 20.48,123.43 IC18.38 | IC18.5 C71.1 11.59,117.63 11.11,118.11 10,119.22 R25.1 10,119.28 10,119.86 10,120.02 10.16,120.17 10.64,120.17 12.86,122.4 12.86,123.51 v12.7,123.67
  Top 0.406: IC18.27 23.98,116.04 23.81,116.2 23.81,117.16 | 23.81,117.16 23.81,117.47 23.98,117.64 IC18.29 27.15,117.64 27.46,117.95 27.46,120.73 C70.1 C69.1 | 20.95,117.16 20.48,117.16 | 20.48,117.16 20.95,117.16 | 20.95,117.16 23.81,117.16 | IC18.17 19.68,113.35 20.95,114.62 20.95,117.16 | 33.09,119.94 32.54,120.49 32.54,121.6 32.23,121.92 30.56,121.92 | IC18.5 15.09,117.64 14.92,117.63 15.08,117.63 15.56,117.16 19.68,117.16 | IC18.38 20.48,121.6 20.48,121.45 20.16,121.13 20.16,120.49 19.68,120.02 19.68,118.27 19.68,117.16 | 19.68,117.16 20.48,117.16
  Bottom 0.305: 10.79,122.4 +5V8.TP 12.54,123.67 v12.7,123.67
+5V9  (via drill 0.7)
  Top 0.305: IC19.20 82.89,119.94 | 82.89,119.94 L10.2 | 82.89,119.94 82.62,119.94 | 80.09,121.92 C77.1 | IC20.17 69.22,109.78 C80.1 | 71.12,124.46 C73.1 70.02,123.43 IC20.38 | IC20.5 C79.1 61.12,117.63 60.64,118.11 59.53,119.22 R28.1 59.53,119.28 59.53,119.86 59.53,120.02 59.69,120.17 60.17,120.17 62.39,122.4 62.39,123.51 v62.23,123.67
  Top 0.406: IC20.27 73.51,116.04 73.34,116.2 73.34,117.16 | 73.34,117.16 73.34,117.47 73.51,117.64 IC20.29 76.68,117.64 76.99,117.95 76.99,120.73 C78.1 C77.1 | 70.48,117.16 70.01,117.16 | 70.01,117.16 70.48,117.16 | 70.48,117.16 73.34,117.16 | IC20.17 69.22,113.35 70.48,114.62 70.48,117.16 | 82.62,119.94 82.07,120.49 82.07,121.6 81.76,121.92 80.09,121.92 | IC20.5 64.62,117.64 64.45,117.63 64.61,117.63 65.09,117.16 69.22,117.16 | IC20.38 70.02,121.6 70.02,121.45 69.69,121.13 69.69,120.49 69.22,120.02 69.22,118.27 69.22,117.16 | 69.22,117.16 70.01,117.16
  Bottom 0.305: 60.33,122.4 +5V9.TP 62.07,123.67 v62.23,123.67
CLOCK
  Top 0.305: STRIP_CONNECTOR.2 11.43,20.32 12.7,19.05 13.49,19.05 15.24,17.3 18.57,17.3 18.89,16.99 IC1.40
CLOCK1
  Top 0.305: STRIP_CONNECTOR1.2 60.96,20.32 62.23,19.05 63.02,19.05 64.77,17.3 68.1,17.3 68.42,16.99 IC4.40
CLOCK2
  Top 0.305: STRIP_CONNECTOR2.2 11.43,46.99 12.7,45.72 13.49,45.72 15.24,43.97 18.57,43.97 18.89,43.66 IC6.40
CLOCK3
  Top 0.305: STRIP_CONNECTOR3.2 60.96,46.99 62.23,45.72 63.02,45.72 64.77,43.97 68.1,43.97 68.42,43.66 IC8.40
CLOCK4
  Top 0.305: STRIP_CONNECTOR4.2 11.43,73.66 12.7,72.39 13.49,72.39 15.24,70.64 18.57,70.64 18.89,70.33 IC10.40
CLOCK5
  Top 0.305: STRIP_CONNECTOR5.2 60.96,73.66 62.23,72.39 63.02,72.39 64.77,70.64 68.1,70.64 68.42,70.33 IC12.40
CLOCK6
  Top 0.305: STRIP_CONNECTOR6.2 11.43,100.33 12.7,99.06 13.49,99.06 15.24,97.31 18.57,97.31 18.89,97 IC14.40
CLOCK7
  Top 0.305: STRIP_CONNECTOR7.2 60.96,100.33 62.23,99.06 63.02,99.06 64.77,97.31 68.1,97.31 68.42,97 IC16.40
CLOCK8
  Top 0.305: STRIP_CONNECTOR8.2 11.43,127 12.7,125.73 13.49,125.73 15.24,123.98 18.57,123.98 18.89,123.67 IC18.40
CLOCK9
  Top 0.305: STRIP_CONNECTOR9.2 60.96,127 62.23,125.73 63.02,125.73 64.77,123.98 68.1,123.98 68.42,123.67 IC20.40
D0
  Top 0.305: IC1.19 21.27,4.37 21.27,5.4 21.91,6.03 23.81,6.03 24.45,5.4 26.35,5.4 26.67,5.71 27.94,5.71 28.1,5.56 28.16,5.5 IC2.1
D1
  Top 0.305: IC2.5 30.76,3.14 29.84,2.22 23.18,2.22 22.23,3.17 22.09,3.31 IC1.20
D2
  Top 0.305: IC2.3 29.46,3.11 29.21,2.86 23.5,2.86 22.86,3.49 22.86,4.33 IC1.21
D3  (via drill 0.7)
  Top 0.305: IC1.22 24.05,4.36 24.29,4.6 v26.99,4.6 | IC2.11 34.66,6.08 v34.92,6.35
  Bottom 0.305: v26.99,4.6 28.26,4.76 32.38,4.76 33.97,6.35 v34.92,6.35
D4
  Top 0.305: IC1.23 26.32,6.16 26.51,6.35 28.26,6.35 28.81,5.8 IC2.2
D5
  Top 0.305: IC2.9 33.36,5.38 31.75,6.99 28.89,6.99 28.26,6.99 25.51,6.99 IC1.24
D6
  Top 0.305: IC1.25 28.08,7.76 28.57,7.78 31.75,7.78 33.81,5.71 34.01,5.52 IC2.10
D7  (via drill 0.7)
  Top 0.305: IC1.26 24.28,8.56 v23.5,7.78 | IC2.6 31.41,5.74 v31.27,5.87
  Bottom 0.305: v23.5,7.78 30,7.78 31.27,6.51 v31.27,5.87
D8
  Top 0.305: IC4.19 70.8,4.37 70.8,5.4 71.44,6.03 73.34,6.03 73.98,5.4 75.88,5.4 76.2,5.71 77.47,5.71 77.63,5.56 77.69,5.5 IC3.1
D9
  Top 0.305: IC3.5 80.29,3.14 79.38,2.22 72.71,2.22 71.75,3.17 71.61,3.31 IC4.20
D10
  Top 0.305: IC3.3 78.99,3.11 78.74,2.86 73.03,2.86 72.39,3.49 72.39,4.33 IC4.21
D11  (via drill 0.7)
  Top 0.305: IC4.22 73.58,4.36 73.82,4.6 v76.52,4.6 | IC3.11 84.19,6.08 v84.45,6.35
  Bottom 0.305: v76.52,4.6 77.79,4.76 81.92,4.76 83.5,6.35 v84.45,6.35
D12
  Top 0.305: IC4.23 75.85,6.16 76.04,6.35 77.79,6.35 78.34,5.8 IC3.2
D13
  Top 0.305: IC4.25 77.61,7.76 78.11,7.78 81.28,7.78 83.34,5.71 83.54,5.52 IC3.10
D14  (via drill 0.7)
  Top 0.305: IC4.26 73.81,8.56 v73.03,7.78 | IC3.6 80.94,5.74 v80.8,5.87
  Bottom 0.305: v73.03,7.78 79.53,7.78 80.8,6.51 v80.8,5.87
D15
  Top 0.305: IC3.9 82.89,5.38 81.28,6.99 78.42,6.99 77.79,6.99 75.04,6.99 IC4.24
D16
  Top 0.305: IC6.19 21.27,31.04 21.27,32.07 21.91,32.7 23.81,32.7 24.45,32.07 26.35,32.07 26.67,32.38 27.94,32.38 28.1,32.23 28.16,32.16 IC5.1
D17
  Top 0.305: IC5.5 30.76,29.81 29.84,28.89 23.18,28.89 22.23,29.84 22.09,29.98 IC6.20
D18
  Top 0.305: IC5.3 29.46,29.78 29.21,29.53 23.5,29.53 22.86,30.16 22.86,31 IC6.21
D19  (via drill 0.7)
  Top 0.305: IC6.22 24.05,31.03 24.29,31.27 v26.99,31.27 | IC5.11 34.66,32.76 v34.92,33.02
  Bottom 0.305: v26.99,31.27 28.26,31.43 32.38,31.43 33.97,33.02 v34.92,33.02
D20
  Top 0.305: IC6.23 26.32,32.83 26.51,33.02 28.26,33.02 28.81,32.47 IC5.2
D21
  Top 0.305: IC6.25 28.08,34.43 28.57,34.45 31.75,34.45 33.81,32.38 34.01,32.19 IC5.10
D22  (via drill 0.7)
  Top 0.305: IC6.26 24.28,35.23 v23.5,34.45 | IC5.6 31.41,32.41 v31.27,32.54
  Bottom 0.305: v23.5,34.45 30,34.45 31.27,33.18 v31.27,32.54
D23
  Top 0.305: IC5.9 33.36,32.05 31.75,33.66 28.89,33.66 28.26,33.66 25.51,33.66 IC6.24
D24
  Top 0.305: IC8.19 70.8,31.04 70.8,32.07 71.44,32.7 73.34,32.7 73.98,32.07 75.88,32.07 76.2,32.38 77.47,32.38 77.63,32.23 77.69,32.16 IC7.1
D25
  Top 0.305: IC7.5 80.29,29.81 79.38,28.89 72.71,28.89 71.75,29.84 71.61,29.98 IC8.20
D26
  Top 0.305: IC7.3 78.99,29.78 78.74,29.53 73.03,29.53 72.39,30.16 72.39,31 IC8.21
D27  (via drill 0.7)
  Top 0.305: IC8.22 73.58,31.03 73.82,31.27 v76.52,31.27 | IC7.11 84.19,32.76 v84.45,33.02
  Bottom 0.305: v76.52,31.27 77.79,31.43 81.92,31.43 83.5,33.02 v84.45,33.02
D28
  Top 0.305: IC8.23 75.85,32.83 76.04,33.02 77.79,33.02 78.34,32.47 IC7.2
D29
  Top 0.305: IC8.25 77.61,34.43 78.11,34.45 81.28,34.45 83.34,32.38 83.54,32.19 IC7.10
D30  (via drill 0.7)
  Top 0.305: IC8.26 73.81,35.23 v73.03,34.45 | IC7.6 80.94,32.41 v80.8,32.54
  Bottom 0.305: v73.03,34.45 79.53,34.45 80.8,33.18 v80.8,32.54
D31
  Top 0.305: IC7.9 82.89,32.05 81.28,33.66 78.42,33.66 77.79,33.66 75.04,33.66 IC8.24
D32
  Top 0.305: IC10.19 21.27,57.71 21.27,58.74 21.91,59.37 23.81,59.37 24.45,58.74 26.35,58.74 26.67,59.05 27.94,59.05 28.1,58.9 28.16,58.84 IC9.1
D33
  Top 0.305: IC9.5 30.76,56.48 29.84,55.56 23.18,55.56 22.23,56.52 22.09,56.66 IC10.20
D34
  Top 0.305: IC9.3 29.46,56.45 29.21,56.2 23.5,56.2 22.86,56.83 22.86,57.67 IC10.21
D35  (via drill 0.7)
  Top 0.305: IC10.22 24.05,57.7 24.29,57.94 v26.99,57.94 | IC9.11 34.66,59.42 v34.92,59.69
  Bottom 0.305: v26.99,57.94 28.26,58.1 32.38,58.1 33.97,59.69 v34.92,59.69
D36
  Top 0.305: IC10.23 26.32,59.5 26.51,59.69 28.26,59.69 28.81,59.14 IC9.2
D37
  Top 0.305: IC10.25 28.08,61.1 28.57,61.12 31.75,61.12 33.81,59.05 34.01,58.86 IC9.10
D38  (via drill 0.7)
  Top 0.305: IC10.26 24.28,61.9 v23.5,61.12 | IC9.6 31.41,59.08 v31.27,59.21
  Bottom 0.305: v23.5,61.12 30,61.12 31.27,59.85 v31.27,59.21
D39
  Top 0.305: IC9.9 33.36,58.72 31.75,60.33 28.89,60.33 28.26,60.33 25.51,60.33 IC10.24
D40
  Top 0.305: IC12.19 70.8,57.71 70.8,58.74 71.44,59.37 73.34,59.37 73.98,58.74 75.88,58.74 76.2,59.05 77.47,59.05 77.63,58.9 77.69,58.84 IC11.1
D41
  Top 0.305: IC11.5 80.29,56.48 79.38,55.56 72.71,55.56 71.75,56.52 71.61,56.66 IC12.20
D42
  Top 0.305: IC11.3 78.99,56.45 78.74,56.2 73.03,56.2 72.39,56.83 72.39,57.67 IC12.21
D43  (via drill 0.7)
  Top 0.305: IC12.22 73.58,57.7 73.82,57.94 v76.52,57.94 | IC11.11 84.19,59.42 v84.45,59.69
  Bottom 0.305: v76.52,57.94 77.79,58.1 81.92,58.1 83.5,59.69 v84.45,59.69
D44
  Top 0.305: IC12.23 75.85,59.5 76.04,59.69 77.79,59.69 78.34,59.14 IC11.2
D45
  Top 0.305: IC12.25 77.61,61.1 78.11,61.12 81.28,61.12 83.34,59.05 83.54,58.86 IC11.10
D46  (via drill 0.7)
  Top 0.305: IC12.26 73.81,61.9 v73.03,61.12 | IC11.6 80.94,59.08 v80.8,59.21
  Bottom 0.305: v73.03,61.12 79.53,61.12 80.8,59.85 v80.8,59.21
D47
  Top 0.305: IC11.9 82.89,58.72 81.28,60.33 78.42,60.33 77.79,60.33 75.04,60.33 IC12.24
D48
  Top 0.305: IC14.19 21.27,84.38 21.27,85.41 21.91,86.04 23.81,86.04 24.45,85.41 26.35,85.41 26.67,85.72 27.94,85.72 28.1,85.57 28.16,85.5 IC13.1
D49
  Top 0.305: IC13.5 30.76,83.15 29.84,82.23 23.18,82.23 22.23,83.19 22.09,83.33 IC14.20
D50
  Top 0.305: IC13.3 29.46,83.12 29.21,82.87 23.5,82.87 22.86,83.5 22.86,84.34 IC14.21
D51  (via drill 0.7)
  Top 0.305: IC14.22 24.05,84.37 24.29,84.61 v26.99,84.61 | IC13.11 34.66,86.09 v34.92,86.36
  Bottom 0.305: v26.99,84.61 28.26,84.77 32.38,84.77 33.97,86.36 v34.92,86.36
D52
  Top 0.305: IC14.23 26.32,86.17 26.51,86.36 28.26,86.36 28.81,85.81 IC13.2
D53
  Top 0.305: IC14.25 28.08,87.77 28.57,87.79 31.75,87.79 33.81,85.72 34.01,85.53 IC13.10
D54  (via drill 0.7)
  Top 0.305: IC14.26 24.28,88.57 v23.5,87.79 | IC13.6 31.41,85.75 v31.27,85.88
  Bottom 0.305: v23.5,87.79 30,87.79 31.27,86.52 v31.27,85.88
D55
  Top 0.305: IC13.9 33.36,85.39 31.75,87 28.89,87 28.26,87 25.51,87 IC14.24
D56
  Top 0.305: IC16.19 70.8,84.38 70.8,85.41 71.44,86.04 73.34,86.04 73.98,85.41 75.88,85.41 76.2,85.72 77.47,85.72 77.63,85.57 77.69,85.5 IC15.1
D57
  Top 0.305: IC15.5 80.29,83.15 79.38,82.23 72.71,82.23 71.75,83.19 71.61,83.33 IC16.20
D58
  Top 0.305: IC15.3 78.99,83.12 78.74,82.87 73.03,82.87 72.39,83.5 72.39,84.34 IC16.21
D59  (via drill 0.7)
  Top 0.305: IC16.22 73.58,84.37 73.82,84.61 v76.52,84.61 | IC15.11 84.19,86.09 v84.45,86.36
  Bottom 0.305: v76.52,84.61 77.79,84.77 81.92,84.77 83.5,86.36 v84.45,86.36
D60
  Top 0.305: IC16.23 75.85,86.17 76.04,86.36 77.79,86.36 78.34,85.81 IC15.2
D61
  Top 0.305: IC16.25 77.61,87.77 78.11,87.79 81.28,87.79 83.34,85.72 83.54,85.53 IC15.10
D62  (via drill 0.7)
  Top 0.305: IC16.26 73.81,88.57 v73.03,87.79 | IC15.6 80.94,85.75 v80.8,85.88
  Bottom 0.305: v73.03,87.79 79.53,87.79 80.8,86.52 v80.8,85.88
D63
  Top 0.305: IC15.9 82.89,85.39 81.28,87 78.42,87 77.79,87 75.04,87 IC16.24
D64
  Top 0.305: IC18.19 21.27,111.05 21.27,112.08 21.91,112.71 23.81,112.71 24.45,112.08 26.35,112.08 26.67,112.39 27.94,112.39 28.1,112.24 28.16,112.17 IC17.1
D65
  Top 0.305: IC17.5 30.76,109.82 29.84,108.9 23.18,108.9 22.23,109.86 22.09,110 IC18.20
D66
  Top 0.305: IC17.3 29.46,109.79 29.21,109.54 23.5,109.54 22.86,110.17 22.86,111.02 IC18.21
D67  (via drill 0.7)
  Top 0.305: IC18.22 24.05,111.04 24.29,111.28 v26.99,111.28 | IC17.11 34.66,112.77 v34.92,113.03
  Bottom 0.305: v26.99,111.28 28.26,111.44 32.38,111.44 33.97,113.03 v34.92,113.03
D68
  Top 0.305: IC18.23 26.32,112.84 26.51,113.03 28.26,113.03 28.81,112.48 IC17.2
D69
  Top 0.305: IC18.25 28.08,114.44 28.57,114.46 31.75,114.46 33.81,112.39 34.01,112.2 IC17.10
D70  (via drill 0.7)
  Top 0.305: IC18.26 24.28,115.24 v23.5,114.46 | IC17.6 31.41,112.42 v31.27,112.55
  Bottom 0.305: v23.5,114.46 30,114.46 31.27,113.19 v31.27,112.55
D71
  Top 0.305: IC17.9 33.36,112.06 31.75,113.67 28.89,113.67 28.26,113.67 25.51,113.67 IC18.24
D72
  Top 0.305: IC20.19 70.8,111.05 70.8,112.08 71.44,112.71 73.34,112.71 73.98,112.08 75.88,112.08 76.2,112.39 77.47,112.39 77.63,112.24 77.69,112.17 IC19.1
D73
  Top 0.305: IC19.5 80.29,109.82 79.38,108.9 72.71,108.9 71.75,109.86 71.61,110 IC20.20
D74
  Top 0.305: IC19.3 78.99,109.79 78.74,109.54 73.03,109.54 72.39,110.17 72.39,111.02 IC20.21
D75  (via drill 0.7)
  Top 0.305: IC20.22 73.58,111.04 73.82,111.28 v76.52,111.28 | IC19.11 84.19,112.77 v84.45,113.03
  Bottom 0.305: v76.52,111.28 77.79,111.44 81.92,111.44 83.5,113.03 v84.45,113.03
D76
  Top 0.305: IC20.23 75.85,112.84 76.04,113.03 77.79,113.03 78.34,112.48 IC19.2
D77
  Top 0.305: IC20.25 77.61,114.44 78.11,114.46 81.28,114.46 83.34,112.39 83.54,112.2 IC19.10
D78  (via drill 0.7)
  Top 0.305: IC20.26 73.81,115.24 v73.03,114.46 | IC19.6 80.94,112.42 v80.8,112.55
  Bottom 0.305: v73.03,114.46 79.53,114.46 80.8,113.19 v80.8,112.55
D79
  Top 0.305: IC19.9 82.89,112.06 81.28,113.67 78.42,113.67 77.79,113.67 75.04,113.67 IC20.24
D+
  Top 0.305: X1.3 37.72,12.38 IC2.15
D+1
  Top 0.305: X2.3 87.25,12.38 IC3.15
D+2
  Top 0.305: X3.3 37.72,39.05 IC5.15
D+3
  Top 0.305: X4.3 87.25,39.05 IC7.15
D+4
  Top 0.305: X5.3 37.72,65.72 IC9.15
D+5
  Top 0.305: X6.3 87.25,65.72 IC11.15
D+6
  Top 0.305: X7.3 37.72,92.39 IC13.15
D+7
  Top 0.305: X8.3 87.25,92.39 IC15.15
D+8
  Top 0.305: X9.3 37.72,119.06 IC17.15
D+9
  Top 0.305: X10.3 87.25,119.06 IC19.15
D-
  Top 0.305: X1.2 38.57,11.58 36.83,9.84 36.2,9.84 35.96,10.08 IC2.16
D-1
  Top 0.305: X2.2 88.1,11.58 86.36,9.84 85.72,9.84 85.49,10.08 IC3.16
D-2
  Top 0.305: X3.2 38.57,38.25 36.83,36.51 36.2,36.51 35.96,36.75 IC5.16
D-3
  Top 0.305: X4.2 88.1,38.25 86.36,36.51 85.72,36.51 85.49,36.75 IC7.16
D-4
  Top 0.305: X5.2 38.57,64.92 36.83,63.18 36.2,63.18 35.96,63.42 IC9.16
D-5
  Top 0.305: X6.2 88.1,64.92 86.36,63.18 85.72,63.18 85.49,63.42 IC11.16
D-6
  Top 0.305: X7.2 38.57,91.59 36.83,89.85 36.2,89.85 35.96,90.09 IC13.16
D-7
  Top 0.305: X8.2 88.1,91.59 86.36,89.85 85.72,89.85 85.49,90.09 IC15.16
D-8
  Top 0.305: X9.2 38.57,118.26 36.83,116.52 36.2,116.52 35.96,116.76 IC17.16
D-9
  Top 0.305: X10.2 88.1,118.26 86.36,116.52 85.72,116.52 85.49,116.76 IC19.16
DATA  (via drill 0.7)
  Top 0.305: IC1.10 16.48,6.96 v17.14,7.62
  Bottom 0.305: v17.14,7.62 17.14,9.53 18.1,10.48 18.89,10.48 19.84,11.43 19.84,13.49 20.16,13.81 20.16,18.1 19.21,19.05 17.94,20.32 15.56,20.32 14.76,19.53 9.68,19.53 8.89,20.32 8.89,20.95 STRIP_CONNECTOR.1
DATA1  (via drill 0.7)
  Top 0.305: IC4.10 66.02,6.96 v66.67,7.62
  Bottom 0.305: v66.67,7.62 66.67,9.53 67.63,10.48 68.42,10.48 69.37,11.43 69.37,13.49 69.69,13.81 69.69,18.1 68.74,19.05 67.47,20.32 65.09,20.32 64.29,19.53 59.21,19.53 58.42,20.32 58.42,20.95 STRIP_CONNECTOR1.1
DATA2  (via drill 0.7)
  Top 0.305: IC6.10 16.48,33.63 v17.14,34.29
  Bottom 0.305: v17.14,34.29 17.14,36.2 18.1,37.15 18.89,37.15 19.84,38.1 19.84,40.16 20.16,40.48 20.16,44.77 19.21,45.72 17.94,46.99 15.56,46.99 14.76,46.2 9.68,46.2 8.89,46.99 8.89,47.62 STRIP_CONNECTOR2.1
DATA3  (via drill 0.7)
  Top 0.305: IC8.10 66.02,33.63 v66.67,34.29
  Bottom 0.305: v66.67,34.29 66.67,36.2 67.63,37.15 68.42,37.15 69.37,38.1 69.37,40.16 69.69,40.48 69.69,44.77 68.74,45.72 67.47,46.99 65.09,46.99 64.29,46.2 59.21,46.2 58.42,46.99 58.42,47.62 STRIP_CONNECTOR3.1
DATA4  (via drill 0.7)
  Top 0.305: IC10.10 16.48,60.3 v17.14,60.96
  Bottom 0.305: v17.14,60.96 17.14,62.87 18.1,63.82 18.89,63.82 19.84,64.77 19.84,66.83 20.16,67.15 20.16,71.44 19.21,72.39 17.94,73.66 15.56,73.66 14.76,72.87 9.68,72.87 8.89,73.66 8.89,74.3 STRIP_CONNECTOR4.1
DATA5  (via drill 0.7)
  Top 0.305: IC12.10 66.02,60.3 v66.67,60.96
  Bottom 0.305: v66.67,60.96 66.67,62.87 67.63,63.82 68.42,63.82 69.37,64.77 69.37,66.83 69.69,67.15 69.69,71.44 68.74,72.39 67.47,73.66 65.09,73.66 64.29,72.87 59.21,72.87 58.42,73.66 58.42,74.3 STRIP_CONNECTOR5.1
DATA6  (via drill 0.7)
  Top 0.305: IC14.10 16.48,86.97 v17.14,87.63
  Bottom 0.305: v17.14,87.63 17.14,89.53 18.1,90.49 18.89,90.49 19.84,91.44 19.84,93.5 20.16,93.82 20.16,98.11 19.21,99.06 17.94,100.33 15.56,100.33 14.76,99.54 9.68,99.54 8.89,100.33 8.89,100.97 STRIP_CONNECTOR6.1
DATA7  (via drill 0.7)
  Top 0.305: IC16.10 66.02,86.97 v66.67,87.63
  Bottom 0.305: v66.67,87.63 66.67,89.53 67.63,90.49 68.42,90.49 69.37,91.44 69.37,93.5 69.69,93.82 69.69,98.11 68.74,99.06 67.47,100.33 65.09,100.33 64.29,99.54 59.21,99.54 58.42,100.33 58.42,100.97 STRIP_CONNECTOR7.1